# EAGLE board BioHackBoardA4982 (EAGLE 6.6.0)
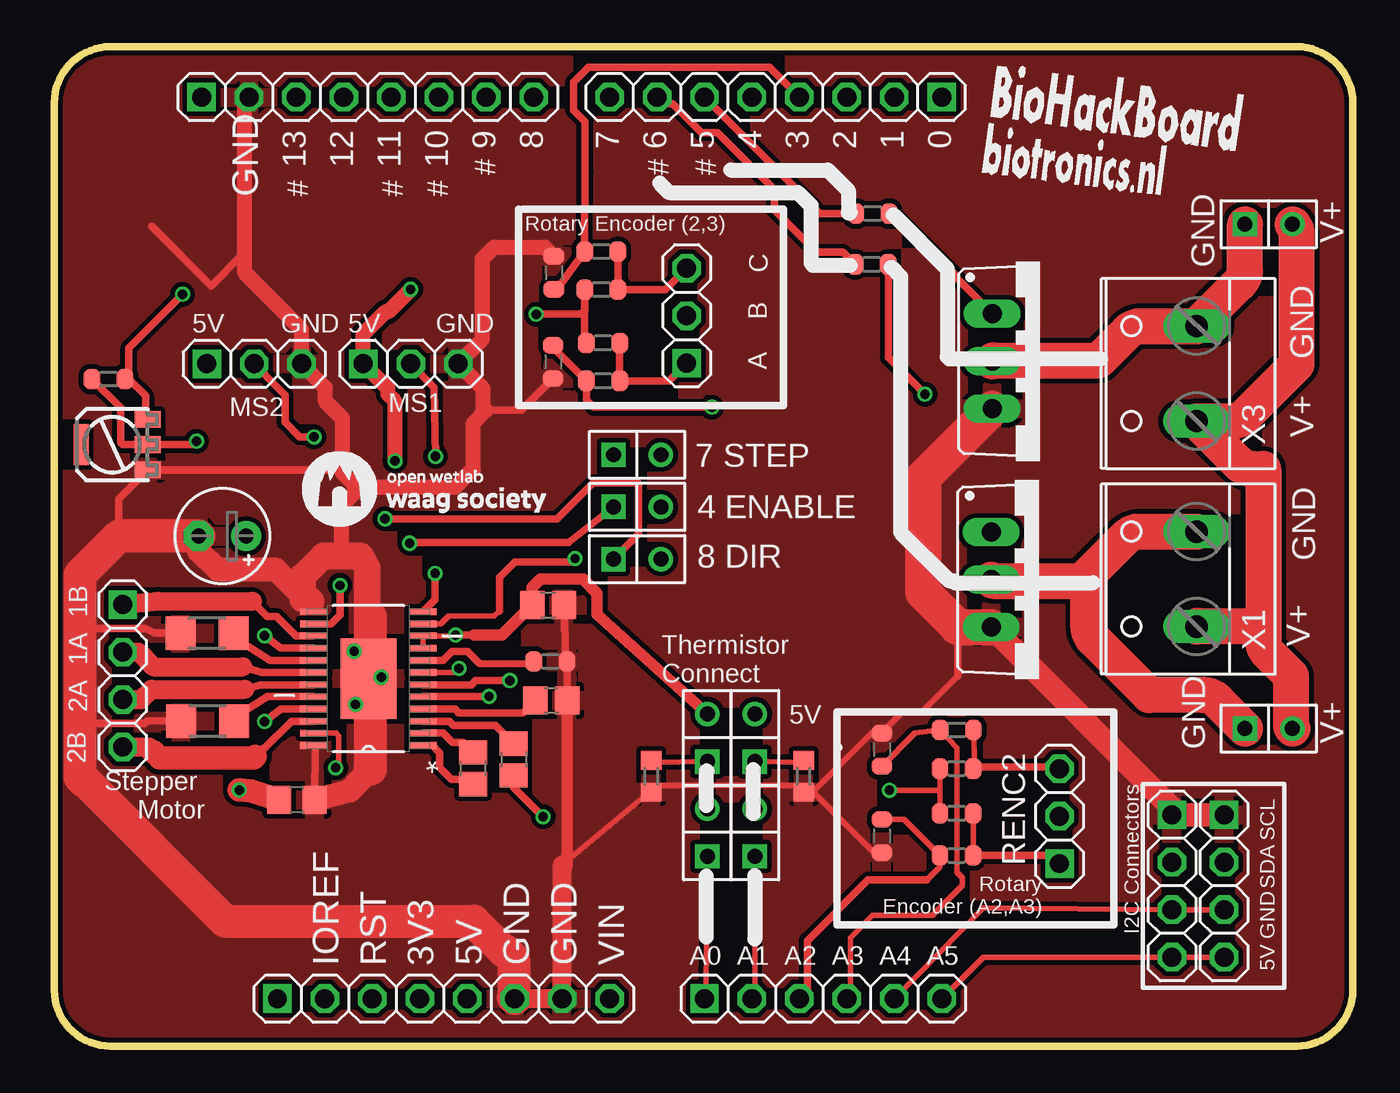
[diagram p0: board, top side]
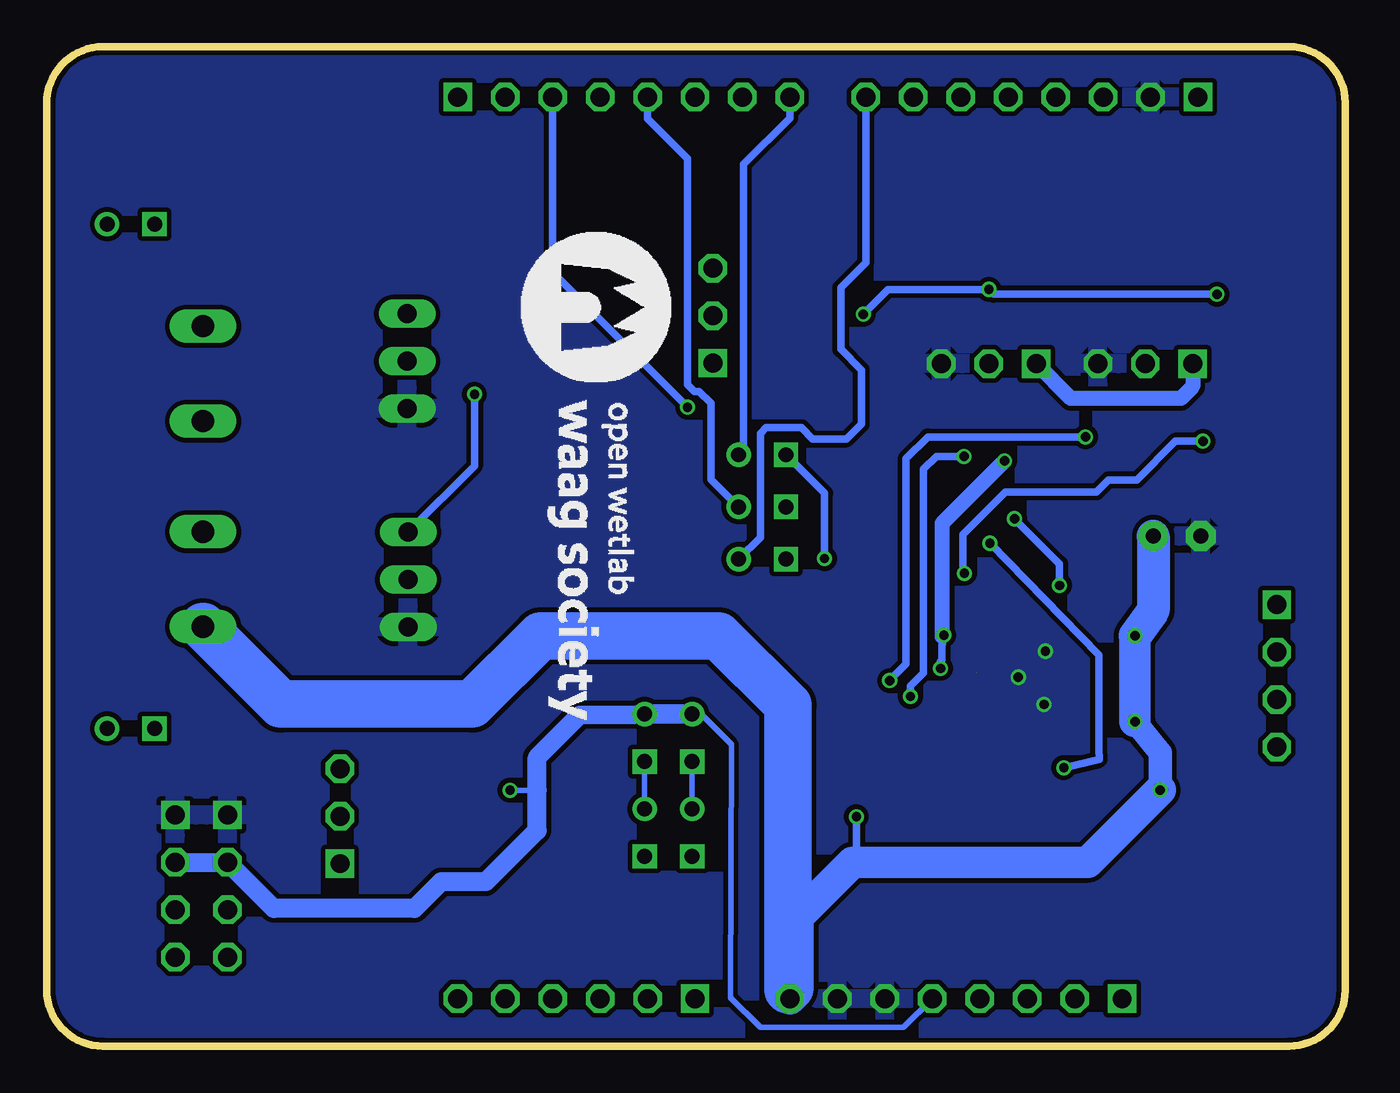
[diagram p1: board, bottom side, seen from below]

Size 69.5 x 53.5 mm. Coordinates in mm from the lower left corner, seen from the top.
Outline: 3,0 arc-90 0,3 0,50.5 arc-90 3,53.5 66.5,53.5 arc-90 69.5,50.5 69.5,3 arc-90 66.5,0 3,0
Copper layers (1*16): Top 0.035mm / dielectric 1.5mm / Bottom 0.035mm
Design rules "dirt_cheap_dirty_boards.v1": minimum track width 5mil, minimum drill 12mil, track to track 5mil, track to pad 5mil, pad to pad 5mil, via to via 5mil, smd to smd 0mil, copper to edge 10mil, drill to drill 10mil, minimum pad ring 10mil, minimum via ring 6mil, stop-mask expansion 2mil, vias tented up to drill 25mil, thermal gap 10mil
Net classes: 2 gnd: width 0.254 mm, drill 0.61 mm, clearance 0.254 mm; 3 usbvcc: width 0.254 mm, drill 0.61 mm, clearance 0.254 mm; 4 aref: width 0.254 mm, drill 0.61 mm, clearance 0.254 mm
vRestrict: area 48.5,38.6 to 49.1,38.9; area 41.8,35.2 to 42.4,35.7; area 50.5,35.2 to 51.2,35.7; area 47.3,35.2 to 47.8,35.7; area 53.9,10.3 to 54.5,10.8; area 56.4,10.2 to 56.9,11

## Footprints (pad centres in the part's own frame; a part is rotated, then mirrored left to right if it is on the bottom)
C0805 = smd 1.3 x 1.5: 1 -0.85,0; 2 0.85,0
E2,5-5 = drill 0.813 pad 1.6: + -1.27,0 | drill 0.813 pad 1.6 octagon: - 1.27,0
C0805' = smd 1.3 x 1.5: 1 -0.95,0; 2 0.95,0
C0603-ROUND = smd 0.898 x 1.1: 1 -0.889,0; 2 0.889,0
M1X2 = drill 0.8 square: 1 -1.27,0 | drill 0.8: 2 1.27,0
1X08-S = drill 1.016 square: 1 -8.89,0 | drill 1.016 octagon: 2 -6.35,0; 3 -3.81,0; 4 -1.27,0; 5 1.27,0; 6 3.81,0; 7 6.35,0; 8 8.89,0
1X06-S = drill 1.016 square: 1 -6.35,0 | drill 1.016 octagon: 2 -3.81,0; 3 -1.27,0; 4 1.27,0; 5 3.81,0; 6 6.35,0
1X03-S = drill 1.016 square: 1 -2.54,0 | drill 1.016 octagon: 2 0,0; 3 2.54,0
1X04-S = drill 1.016 square: 1 -3.81,0 | drill 1.016 octagon: 2 -1.27,0; 3 1.27,0; 4 3.81,0
TO220BV = drill 1.016 long: D 0,-2.54; G -2.54,-2.54; S 2.54,-2.54
R0603-ROUND = smd 0.898 x 1.1: 1 -0.889,0; 2 0.889,0
R1206 = smd 1.6 x 1.803: 1 -1.422,0; 2 1.422,0
R0603 = smd 1 x 1.1: 1 -0.85,0; 2 0.85,0
PC25 = smd 2.2 x 0.8: 4 0,1.65 | smd 0.9 x 1.4: A -1.35,-1.9; E 1.35,-1.9; S 0,-1.9
SOP65P640X120-25N = smd 1.473 x 0.356: 1 -2.921,3.581; 2 -2.921,2.921; 3 -2.921,2.286; 4 -2.921,1.626; 5 -2.921,0.965; 6 -2.921,0.33; 7 -2.921,-0.33; 8 -2.921,-0.965; 9 -2.921,-1.626; 10 -2.921,-2.286; 11 -2.921,-2.921; 12 -2.921,-3.581; 13 2.921,-3.581; 14 2.921,-2.921; 15 2.921,-2.286; 16 2.921,-1.626; 17 2.921,-0.965; 18 2.921,-0.33; 19 2.921,0.33; 20 2.921,0.965; 21 2.921,1.626; 22 2.921,2.286; 23 2.921,2.921; 24 2.921,3.581 | smd 2.997 x 4.318: 25 0,0
W237-132 = drill 1.194 long: 1 -2.54,-0.635; 2 2.54,-0.635

## Placement (x,y rotation side)
C1  220n  [C0805]  26.43,23.62 0 top
C2  100uF  [E2,5-5]  9,27.3 180 top
C3  100n  [C0805]  22.4,14.87 270 top
C4  100n  [C0805]  24.59,15.35 270 top
C5  220n  [C0805]  26.6,18.5 180 top
C6  1uF  [C0805']  12.99,13.19 180 top
C16  1u  [C0603-ROUND]  44.29,11.25 270 top
C19  1u  [C0603-ROUND]  26.7,36.63 270 top
C20  1u  [C0603-ROUND]  26.74,41.39 270 top
C27  1u  [C0603-ROUND]  44.29,15.87 270 top
J1  CON_HEADER_1X02-PTH  [M1X2]  31.2,28.86 0 top
J2  8x1F-H8.5  [1X08-S]  38.61,50.8 180 top
J3  8x1F-H8.5  [1X08-S]  20.83,2.54 0 top
J4  6x1F-H8.5  [1X06-S]  41.15,2.54 0 top
J5  CON_HEADER_1X02-PTH  [M1X2]  31.2,31.66 0 top
J6  CON_HEADER_1X02-PTH  [M1X2]  31.2,26.07 0 top
J7  CON_HEADER_1X02-PTH  [M1X2]  34.96,16.51 90 top
J8  CON_HEADER_1X02-PTH  [M1X2]  37.5,16.51 90 top
J9  CON_HEADER_1X02-PTH  [M1X2]  37.5,11.43 90 top
J10  CON_HEADER_1X02-PTH  [M1X2]  34.96,11.43 90 top
J11  CON_HEADER_1X02-PTH  [M1X2]  65,44 0 top
J12  CON_HEADER_1X02-PTH  [M1X2]  65,17 0 top
JP1  [1X03-S]  10.7,36.53 0 top
JP2  [1X04-S]  62.62,8.57 270 top
JP3  [1X08-S]  16.77,50.8 0 top
JP4  [1X03-S]  19.08,36.53 0 top
JP5  [1X04-S]  59.82,8.57 270 top
JP6  [1X04-S]  3.66,19.82 270 top
Q1  IRF512  [TO220BV]  52.74,36.66 270 top
Q2  IRF512  [TO220BV]  52.69,24.98 270 top
R1  220  [R0603-ROUND]  43.8,44.56 180 top
R2  220  [R0603-ROUND]  43.75,41.84 180 top
R3  10k  [R0603-ROUND]  48.29,10.21 0 top
R4  10k  [R0603-ROUND]  48.29,12.46 180 top
R5  10k  [R0603-ROUND]  48.29,14.85 180 top
R6  10k  [R0603-ROUND]  48.3,16.93 0 top
R7  10k  [R0603-ROUND]  26.55,20.6 0 top
R9  0.11  [R1206]  8.21,17.4 0 top
R10  0.11  [R1206]  8.18,22.1 0 top
R11  10k  [R0603-ROUND]  2.9,35.71 180 top
R13  10k  [R0603]  31.95,14.45 90 top
R14  10k  [R0603]  40.1,14.45 90 top
R15  [PC25]  3.1,32.2 90 top
R16  10k  [R0603-ROUND]  29.37,35.61 0 top
R17  10k  [R0603-ROUND]  29.37,37.64 180 top
R18  10k  [R0603-ROUND]  29.28,40.5 180 top
R19  10k  [R0603-ROUND]  29.28,42.52 0 top
RENC1  [1X03-S]  33.85,39.1 90 top
RENC2  [1X03-S]  53.8,12.31 90 top
U1  A4982SLPTR-T  [SOP65P640X120-25N]  16.81,19.68 180 top
X1  [W237-132]  60.5,25 90 top
X3  [W237-132]  60.5,36 90 top

## Library data of the parts
C1 C3-C5 C16 C19 C20 C27 R1-R7 R9-R11 R16-R19 = SmartPrj
C2 C6 R13 R14 = rcl
J1 J5-J12 = dp_devices
J2-J4 JP1-JP6 RENC1 RENC2 = pinhead-2
Q1 Q2 = transistor-power
R15 = pot-vitrohm; MF: CLAROSTAT; MPN: 308NPC25KS; OC_FARNELL: 1440998; OC_NEWARK: 03F7518
U1 = Allegro_By_element14_Batch_1; MPN: A4982SLPTR-T; OC_FARNELL: -; OC_NEWARK: 67R9668; PACKAGE: TSSOP-24; SUPPLIER: Allegro
X1 X3 = con-wago-508; OC_FARNELL: unknown; OC_NEWARK: unknown

## Nets
+3V3: J3.4
+5V [usbvcc]: C1.1 J3.5 J7.2 J8.2 JP1.1 JP2.2 JP4.1 JP5.2 R4.2 R5.2 R11.1 R15.E R17.2 R18.2 U1.7 U1.9 U1.10
A0: J4.1 J10.1
A0P: J7.1 J10.2 R13.2
A1: J4.2 J9.1
A1P: J8.1 J9.2 R14.2
A2/RENC2A: C16.1 J4.3 R3.1
A3/RENC2B: C27.2 J4.4 R6.1
A4/SDA: J4.5 JP2.3 JP5.3
A5/SCL: J4.6 JP2.4 JP5.4
AREF [aref]: JP3.1
D0/RX: J2.1
D1/TX: J2.2
D2/RENC1A: C19.1 J2.3 R16.1
D3/RENC1B: C20.2 J2.4 R19.1
D4/~STP_ENABLE: J1.2 J2.5
D5*/MOSFET1: J2.6 R1.2
D6*/MOSFET2: J2.7 R2.2
D7/STEP: J2.8 J5.2
D8/STP_DIR: J6.2 JP3.8
D9*: JP3.7
D10: JP3.6
D11: JP3.5
D12: JP3.4
D13*: JP3.3
GND [gnd]: C1.2 C2.- C5.1 C6.1 C16.2 C19.2 C20.1 C27.1 J3.6 J3.7 JP1.3 JP2.1 JP3.2 JP4.3 JP5.1 Q1.S Q2.S R7.2 R9.1 R10.1 R13.1 R14.1 R15.A U1.13 U1.24 U1.25
MS1: JP4.2 U1.5
MS2: JP1.2 U1.6
N$5: C4.1 U1.3
N$6: R7.1 U1.8
N$8: C3.2 U1.1
N$9: C3.1 U1.2
N$11: R16.2 R17.1 RENC1.1
N$12: R9.2 U1.20
N$13: R3.2 R4.1 RENC2.1
N$14: R10.2 U1.17
N$15: Q2.G R2.1
N$16: R18.1 R19.2 RENC1.3
N$17: Q1.G R1.1
N$18: R5.1 R6.2 RENC2.3
N$21: J11.1 Q1.D X3.2
N$23: J12.1 Q2.D X1.2
N$27: R11.2 R15.S U1.12
OUT1A: JP6.2 U1.18
OUT1B: JP6.1 U1.15
OUT2A: JP6.3 U1.19
OUT2B: JP6.4 U1.22
RESET: J3.3
STP_DIR: J6.1 U1.14
STP_STEP: J5.1 U1.11
VIN [power]: C2.+ C4.2 C6.2 J3.8 J11.2 J12.2 U1.16 U1.21 X1.1 X3.1
VREG: C5.2 U1.4
~STP_ENABLE: J1.1 U1.23

## Tracks (layer width: path | path; a pad name or v marks a point on that pad's centre or on a via)
+5V  (via drill 0.5, 0.5 pad 0.25)  (1 unrouted)
  Top 0.305: R5.2 R4.2 47.4,13.7 v44.7,13.7 | U1.9 U1.10 21.44,21.96 | U1.7 21.44,20 v21.66,20.22
  Top 0.406: v19.07,40.51 18.92,40.51 17.73,39.32 | R17.2 28.39,37.73 R18.2 28.4,40.49 28.4,39.4 28.18,39.18 v25.79,39.18 | R11.1 3.99,35.71 | 3.99,35.71 4.88,34.82 4.88,33.67 R15.E | 3.99,35.71 3.99,37.38 v6.86,40.25 | 21.44,21.96 v21.48,22 22.46,22
  Top 0.61: 22.46,22 23.96,22 C1.1 25.58,24.56 26.02,25 28.29,25 29.05,24.24 29.05,23.12 J7.2
  Top 0.813: v18.23,31.33 18.23,34.52 17.86,34.89 17.86,35.2 JP4.1 16.54,38.12 17.73,39.32 | 17.86,39.3 v19.07,40.51
  Bottom 0.305: J3.5 23.64,1 31.3,1 32.9,2.6 32.85,16.15 34.42,17.72 J7.2 | v44.7,13.7 43.25,13.7
  Bottom 0.406: v25.79,39.18 24.48,40.49 19.09,40.49 v19.07,40.51 18.81,40.25 v6.86,40.25 | v21.48,22 21.56,21.92 21.56,21.5 21.58,21.48 21.58,20.66 21.66,20.58 v21.66,20.22
  Bottom 0.813: 21.56,21.92 21.56,28 v18.23,31.33 | JP1.1 8.15,35.31 8.79,34.67 14.68,34.67 JP4.1
  Bottom 1.016: JP2.2 JP5.2 57.35,7.37 49.81,7.37 48.38,8.8 46,8.8 43.25,11.55 43.25,13.7 43.25,15.45 40.98,17.72 J7.2 J8.2
A0
  Top 0.305: J4.1 34.88,3.09 J10.1
A0P
  Top 0.305: R13.2 32.07,15.18 J7.1
  Bottom 0.305: J10.2 J7.1
A1
  Top 0.305: J4.2 37.5,2.7 J9.1
A1P
  Top 0.305: R14.2 40.03,15.18 J8.1
  Bottom 0.305: J9.2 J8.1
A2/RENC2A
  Top 0.305: J4.3 40.3,2.96 | C16.1 45.47,12.14 R3.1 47.4,9.6 46.7,8.9
  Top 0.406: 40.3,2.96 40.3,5.65 43.55,8.9 46.7,8.9
A3/RENC2B
  Top 0.305: J4.4 42.6,2.72 42.6,5.8 43.8,7 47,7 48.6,8.6 48.6,9 48.3,9.3 48.3,15.96 R6.1 46.07,16.76 C27.2
A4/SDA
  Top 0.305: J4.5 49.72,7.4 JP5.3 JP2.3
  Top 0.406: J4.5 44.8,2.7
A5/SCL
  Top 0.305: J4.6 49.72,4.76 JP5.4 JP2.4
  Top 0.406: J4.6 47.34,2.7
D2/RENC1A  (via drill 0.5)
  Top 0.406: C19.1 26.7,37.39 R16.1 28.48,34.58 28.86,34.2 v35.2,34.2
  Bottom 0.406: v35.2,34.2 42.42,41.42 J2.3
D3/RENC1B
  Top 0.406: C20.2 26.99,40.39 26.99,40.63 R19.1 28.41,46.75 28.41,49.49 27.8,50.1 27.8,51.6 28.6,52.4 38.28,52.4 J2.4
D4/~STP_ENABLE
  Bottom 0.406: J1.2 33.94,30.33 33.94,34.42 34.58,35.05 34.83,35.05 35.2,35.42 35.2,47.5 37.34,49.64 J2.5
D5*/MOSFET1
  Top 0.406: J2.6 40.46,45.14 40.46,45.09 40.99,44.56 R1.2
D6*/MOSFET2
  Top 0.406: J2.7 32.61,50.45 33.1,50.45 34.65,48.9 35.5,48.9 38.55,45.85 38.55,44.75 40.8,42.5 42.2,42.5 R2.2
D7/STEP
  Bottom 0.406: J5.2 32.2,31.93 32.2,47.2 29.72,49.68 J2.8
D8/STP_DIR
  Bottom 0.406: J6.2 31.3,27.24 31.3,32.8 31,33.1 29.1,33.1 28.5,32.5 26.7,32.5 25.9,33.3 25.9,36.2 27,37.3 27,40.6 25.66,41.94 JP3.8
GND  (via drill 0.5 pad 0.25)
  Top 0.305: 27.18,9.7 31.9,13.65 R13.1 32.32,13.97 39.91,13.97 R14.1 40.6,13.6 | C16.2 43.84,10.36 40.6,13.6 | 48.36,19.83 46.43,17.9 45.4,17.9 44.29,16.79 C27.1 43.76,16.76 40.6,13.6
  Top 0.406: JP3.2 10.04,50.42 10.04,42.34 8.39,40.7 5.2,43.89 | C20.1 26.99,42.43 | Q1.S 49.62,34.7 | 22.94,34.04 23.12,34.04 25,34.04 C19.2 | 48.36,19.83 48.36,22.44 | R10.1 5.37,22.11 4.87,22.36 1.7,22.36 | 1.7,22.36 1.6,22.1 | 3.45,27.3 3.45,29.3 R15.A 15.28,30.85 15.4,30.73 | C6.1 13.96,16.03 U1.24 | v16.05,21.14 16.05,21.12 16,21.07 16.01,21.07 16.08,21.14 | v16.05,21.14 16.11,21.14 v17.5,19.75 17.5,19.67 v16.12,18.29 | C5.1 R7.2 27.35,20.69 C1.2 | v16.05,21.14 15.96,21.14 15.93,21.17 16.88,21.17 16.91,21.2 | U1.13 13.89,23.58 13.54,23.93 | 1.7,22.36 1.7,24.13 1.37,24.46 | 1.37,14.4 1.37,17.37 1.4,17.4 1.52,17.28 4.84,17.28 4.96,17.4 R9.1
  Top 0.61: C5.1 27.45,9.68 27.18,9.41 | U1.25 17.43,19.68 v17.5,19.75
  Top 0.813: 23.12,34.04 22.42,33.34 22.42,30.89 21.44,29.91 16.27,29.91 16.27,29.83 16.26,29.82 | C20.1 26.23,42.78 23.55,42.78 22.89,42.12 22.89,37.8 JP4.3 22.94,35.2 22.94,34.04 | 16.26,29.82 15.36,28.92 15.36,26.41 16.39,26.25 | 16.26,29.82 16.28,29.8 16.29,29.8 16.29,29.82 15.41,30.7 15.41,33.63 14.51,34.53 14.51,35.26 JP1.3 13.23,38.36 10.19,41.4 10.19,50.58 JP3.2
  Top 1.016: 27.18,9.7 27.18,9.41 J3.7 J3.6
  Top 1.27: Q2.S 59.82,12.76 JP5.1 JP2.1 | C6.1 15.81,13.68 16.89,14.82 | C2.- 7.73,26.51 8.73,25.51 11.85,25.51 13.35,24.01 13.33,24.01 13.28,23.96
  Top 1.422: 16.91,22.99 16.74,23.16 16.74,25.6 16.45,26.16 16.39,26.25 14.4,26.25 13.28,25.13 13.28,23.96 13.28,23.93 13.54,23.93 13.61,23.93 13.75,23.79
  Top 1.778: C2.- 3.45,27.3 1.37,25.22 1.37,24.46 1.37,14.4 | 1.37,14.4 1.61,14.16 | 16.91,22.99 16.91,21.2 16.91,14.84 16.89,14.82 | 1.37,14.4 1.43,14.4 9.14,6.69 22.45,6.69 24.06,5.08 24.17,5.08 24.57,4.68 24.57,2.61 J3.6
  Top 1.93: Q1.S 46.5,30.42 46.5,24.3 48.36,22.44 Q2.S
  pour Bottom (isolate 0.254): -0.7,54.25 70.39,54.36 70.39,-0.44 -1.6,-1.05 -1.6,51.65
  pour Top (isolate 0.254): -0.84,54.22 70.45,54.63 70.45,-0.67 -1.04,-1.58 -1.04,51.52
MS1  (via drill 0.5 pad 0.25)
  Top 0.406: U1.5 21.56,18.71 v23.27,18.72 | v20.4,31.57 20.34,35.25 20.34,35.26 JP4.2
  Bottom 0.406: v23.27,18.72 23.27,19.28 22.57,19.98 22.57,30.89 21.89,31.57 v20.4,31.57
MS2  (via drill 0.5 pad 0.25)
  Top 0.406: U1.6 22.33,19.34 22.56,19.57 v24.38,19.57 | JP1.2 11.96,35.25 12.35,34.86 12.35,33.4 13.14,32.61 v13.9,32.61
  Bottom 0.406: v13.9,32.61 22.34,32.61 23.5,31.45 23.5,20.45 v24.38,19.57
N$5
  Top 0.406: U1.3 21.15,17.39 21.36,17.18 23.61,17.18 C4.1
N$6
  Top 0.406: 25.62,20.64 R7.1 | 25.41,20.85 R7.1 | R7.1 25.54,20.47 22.75,20.48 22.11,21.12 21.29,21.12 20.81,20.64 U1.8
N$8
  Top 0.406: U1.1 20.24,16.09 20.63,15.71 20.63,14.92 21.26,14.29 22.14,14.29 C3.2
N$9
  Top 0.406: U1.2 20.8,16.76 21.31,16.25 21.88,16.25 C3.1
N$11
  Top 0.406: R17.1 R16.2 32.89,35.61 RENC1.1
N$12
  Top 0.406: U1.20 11.41,18.71 10.48,18.13 10.16,17.92 R9.2
N$13
  Top 0.305: R3.2 R4.1
  Top 0.406: R3.2 53.36,10.21 RENC2.1
N$14
  Top 0.406: U1.17 11.56,20.64 10.58,21.26 10.16,21.52 R10.2
N$15  (via drill 0.5)
  Top 0.406: R2.1 44.63,36.87 v46.6,34.9
  Bottom 0.406: v46.6,34.9 46.6,31.07 Q2.G
N$16
  Top 0.406: R19.2 R18.1 32.7,40.5 RENC1.3
N$17
  Top 0.406: R1.1 44.94,44.56 48.3,41.2 48.3,41.1 Q1.G
N$18
  Top 0.305: R5.1 49.28,14.95 R6.2
  Top 0.406: 49.28,14.95 53.7,14.95 RENC2.3
N$21
  Top 1.93: Q1.D 50.24,36.7 55.9,36.7 57.45,38.25 arc-45 58.15,38.54 X3.2 63.44,40.84 arc45 63.73,41.55 J11.1
N$23
  Top 1.93: Q2.D 50.23,24.9 55,24.9 55.35,25.25 | 55.35,25.25 57.35,27.25 arc-45 58.05,27.54 X1.2 | J12.1 62.22,18.51 arc45 61.52,18.8 58.6,18.8 55.64,21.76 arc-45 55.35,22.46 55.35,25.25
N$27  (via drill 0.5 pad 0.25)
  Top 0.406: R11.2 3.54,34.18 3.54,32.31 3.65,32.2 R15.S 7.43,32.2 v7.61,32.38 | v20.38,25.31 20.38,23.9 U1.12
  Bottom 0.406: v7.61,32.38 9.08,32.38 11.15,30.31 12.67,30.31 13.31,29.67 18.18,29.67 20.47,27.38 20.47,25.4 v20.38,25.31
OUT1A
  Top 0.406: U1.18 11.09,20.01 10.1,20.3
  Top 1.016: JP6.2 4.51,21.09 5.3,20.3 10.1,20.3
OUT1B
  Top 0.406: U1.15 12.94,21.96 11.9,23 11.4,23 10.6,23.81
  Top 1.016: JP6.1 5.55,23.82 10.6,23.81
OUT2A
  Top 0.406: U1.19 11.05,19.35 10.2,19.1
  Top 1.016: JP6.3 4.65,18.55 5.2,19.1 10.2,19.1
OUT2B
  Top 0.406: U1.22 12.69,17.39 11.24,15.94 11.19,15.94 10.76,15.51
  Top 1.016: JP6.4 5.09,16.01 5.29,15.74
  Top 1.27: 5.29,15.74 5.31,15.74 5.63,15.42 10.67,15.42 10.76,15.51
STP_DIR  (via drill 0.5 pad 0.25)
  Top 0.406: U1.14 14.83,22.6 15.3,23.07 v15.3,24.65 v15.29,24.66 | v17.7,28.23 26.92,28.23 28.84,30.15 31.24,30.15 31.27,30.12 31.27,27.41 J6.1
  Bottom 0.406: v15.29,24.66 15.29,25.82 v17.7,28.23
STP_STEP  (via drill 0.5 pad 0.25)
  Top 0.305: U1.11 20.67,22.6 21.09,23.02 23.54,23.02 23.82,23.3
  Top 0.406: 23.82,23.3 23.82,25.08 24.66,25.92 27.69,25.92 v27.87,26.1
  Bottom 0.406: v27.87,26.1 27.87,29.59 J5.1
VIN  (via drill 0.5 pad 0.25)
  Top 0.406: U1.21 12.15,18.05 v11.25,17.37 | U1.16 12.1,21.3 v11.25,21.97 | C4.2 24.59,13.85 v26.16,12.28
  Top 1.27: C6.2 10.5,13.68 v9.9,13.71
  Top 1.93: 64.7,22.5 64.7,30.89 64.11,30.89 arc-45 63.41,31.19 X3.1 63.05,33.46 arc45 63.75,33.75 66.5,36.5 66.5,43.45 arc45 J11.2 | 64.7,22.5 64.7,21.71 arc45 64.99,21.01 66.2,19.8 66.2,17.17 arc45 J12.2 | X1.1 arc-45 61.23,22.5 64.7,22.5
  Bottom 0.406: v26.16,12.28 26.16,10.06 25.95,9.85
  Bottom 1.27: v9.9,13.71 9.9,15.7 v11.25,17.37
  Bottom 1.676: J3.8 29.72,6.5 26.37,9.85 25.95,9.85 13.76,9.85 v9.9,13.71 | v11.25,17.37 v11.25,21.97
  Bottom 1.778: C2.+ 10.27,23.33 v11.25,21.97
  Bottom 2.54: 29.72,6.5 29.72,3.11 29.82,3.01 29.82,18.26 33.53,21.97 43.06,21.97 46.72,18.31 56.98,18.31 X1.1
VREG
  Top 0.406: U1.4 21.45,18.05 21.65,17.85 25.1,17.85 C5.2
~STP_ENABLE  (via drill 0.5 pad 0.25)
  Top 0.305: U1.23 15.07,16.76 15.23,16.6 15.23,15.07 v15.06,14.9
  Top 0.406: J1.1 27.53,26.95 19.52,26.96 19.06,26.96 v19.02,26.92
  Bottom 0.406: v15.06,14.9 13.16,15.35 13.19,15.9 13.19,20.95 v19.02,26.92

## Text on the board
tPlace: 13 | 12 | 11 | 10 | 9 | 8 | 7 | 6 | 5 | 4 | 3 | 2 | 1 | 0 | Rotary Encoder (2,3) | V+ | GND | C | B | 5V | GND | 5V | GND | GND | A | MS2 | MS1 | V+ | 7 STEP | 4 ENABLE | 8 DIR | GND | 1B | V+ | 1A | Thermistor / Connect | 2A | 5V | GND | V+ | 2B | Stepper / Motor | I2C Connectors | SCL | SDA | Rotary / Encoder (A2,A3) | GND | 5V
tNames: # | # | # | GND | # | # | # | IOREF | RST | 3V3 | 5V | GND | GND | VIN | A0 | A1 | A2 | A3 | A4 | A5